# Altium PCB PCB1.PcbDoc
Units mm, origin at the board's own origin, x right, y up, seen from the top; angles counter-clockwise.
Board outline 72.39 x 101.6 mm, 2 copper layers (Top Layer, Bottom Layer); 11 components, 17 nets, 62 pads, 0 vias.
Unrouted connection lines stored in the file: 1.
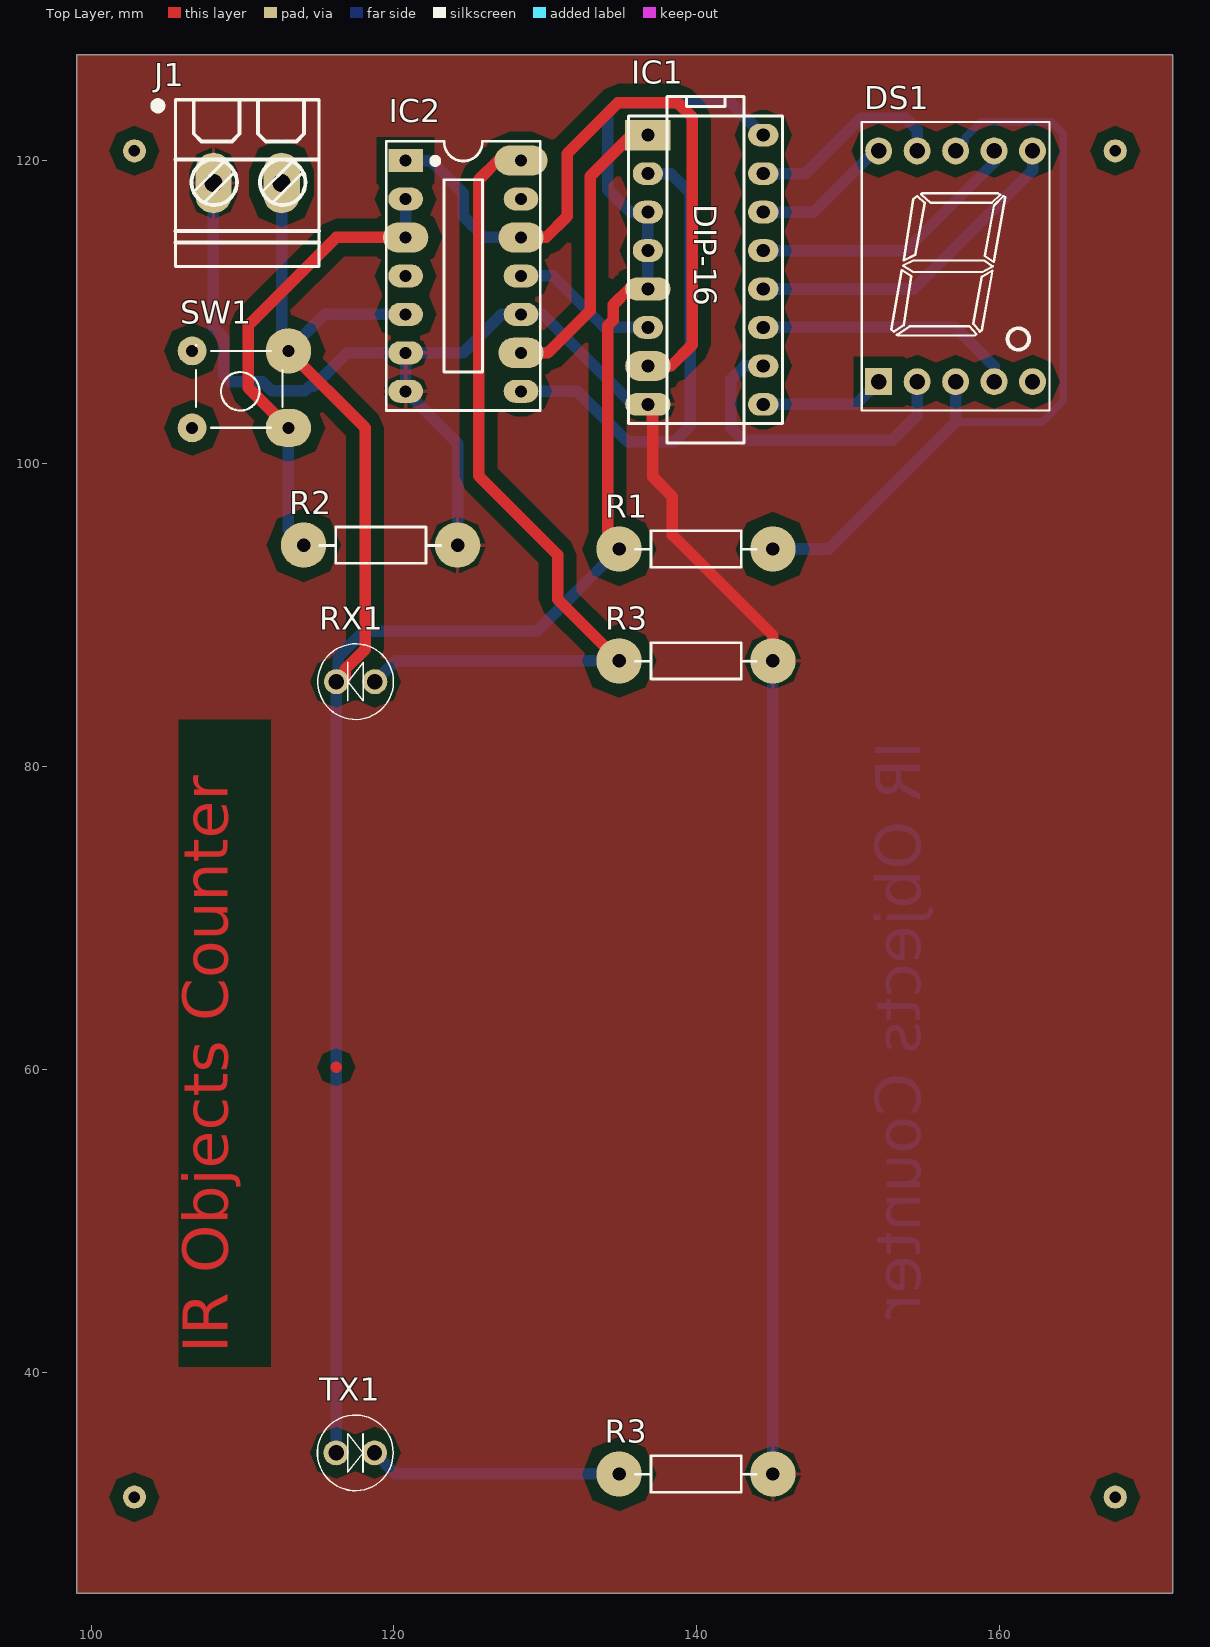
[diagram p0: Top Layer view]
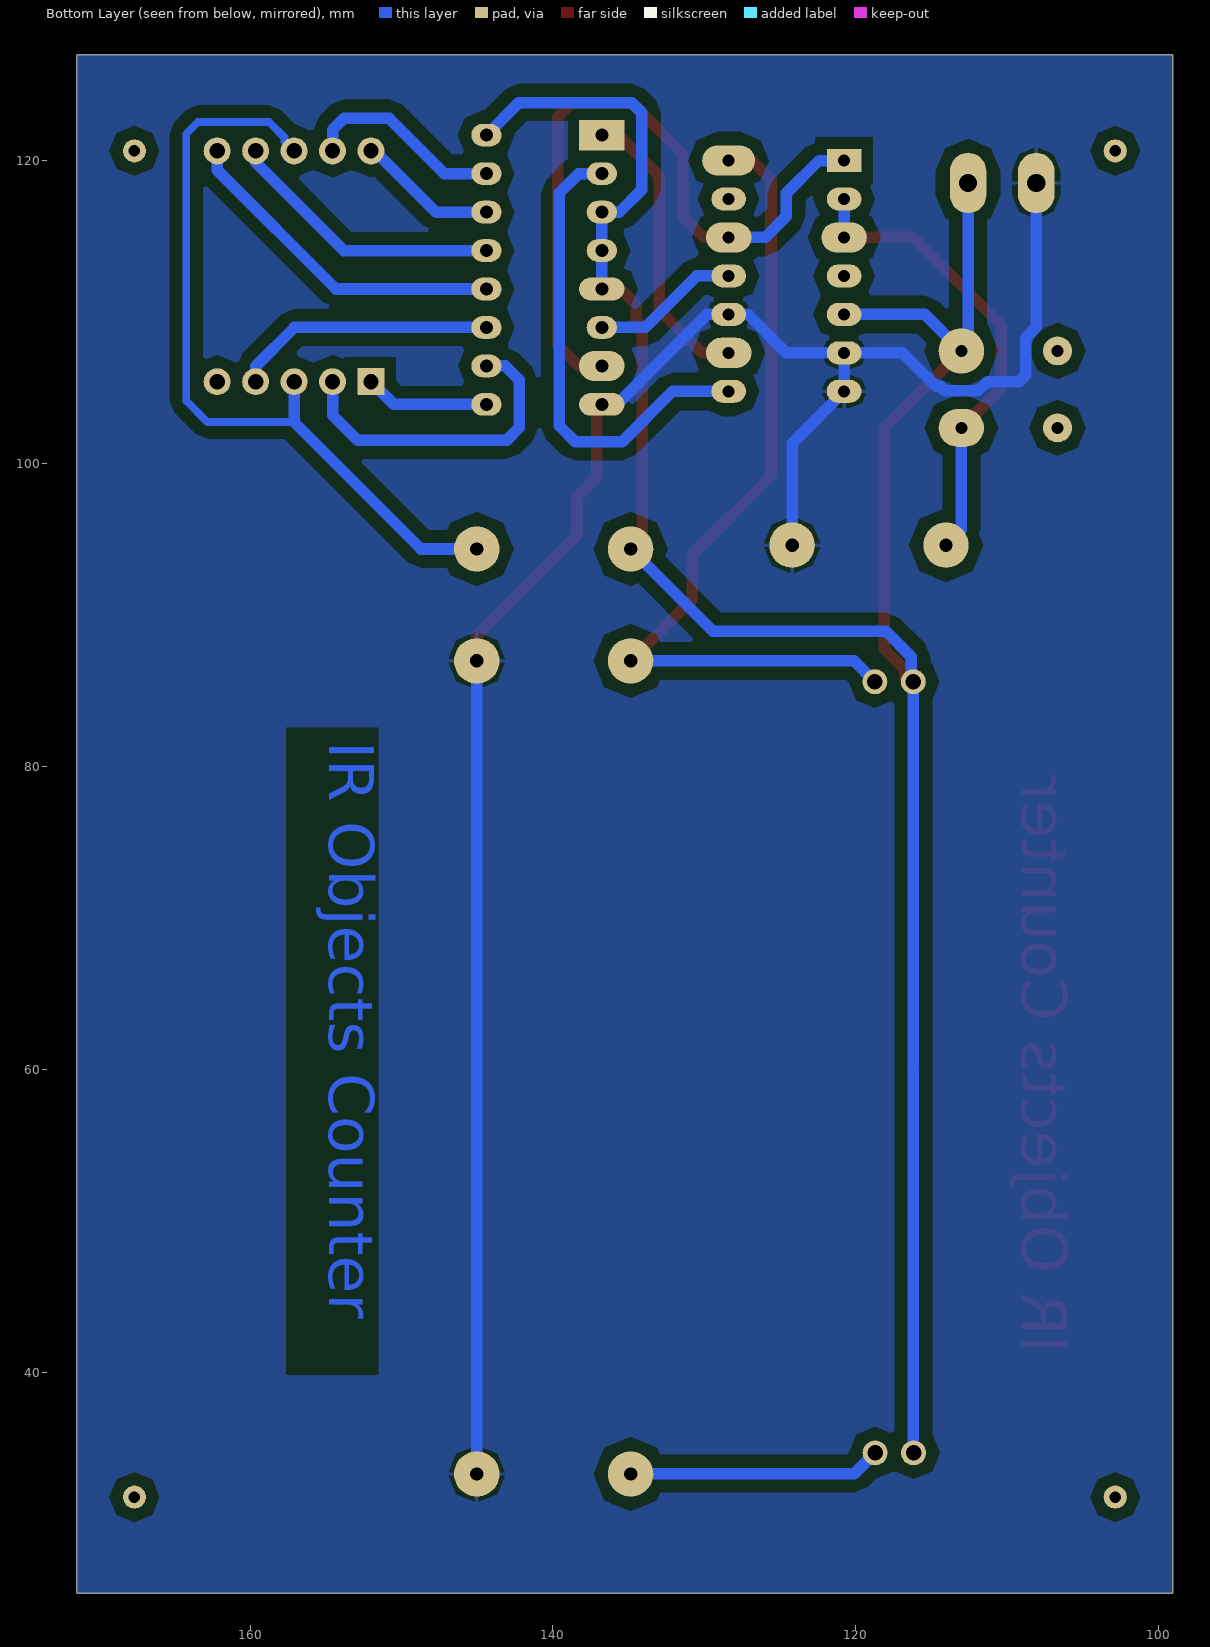
[diagram p1: Bottom Layer view, seen from below]
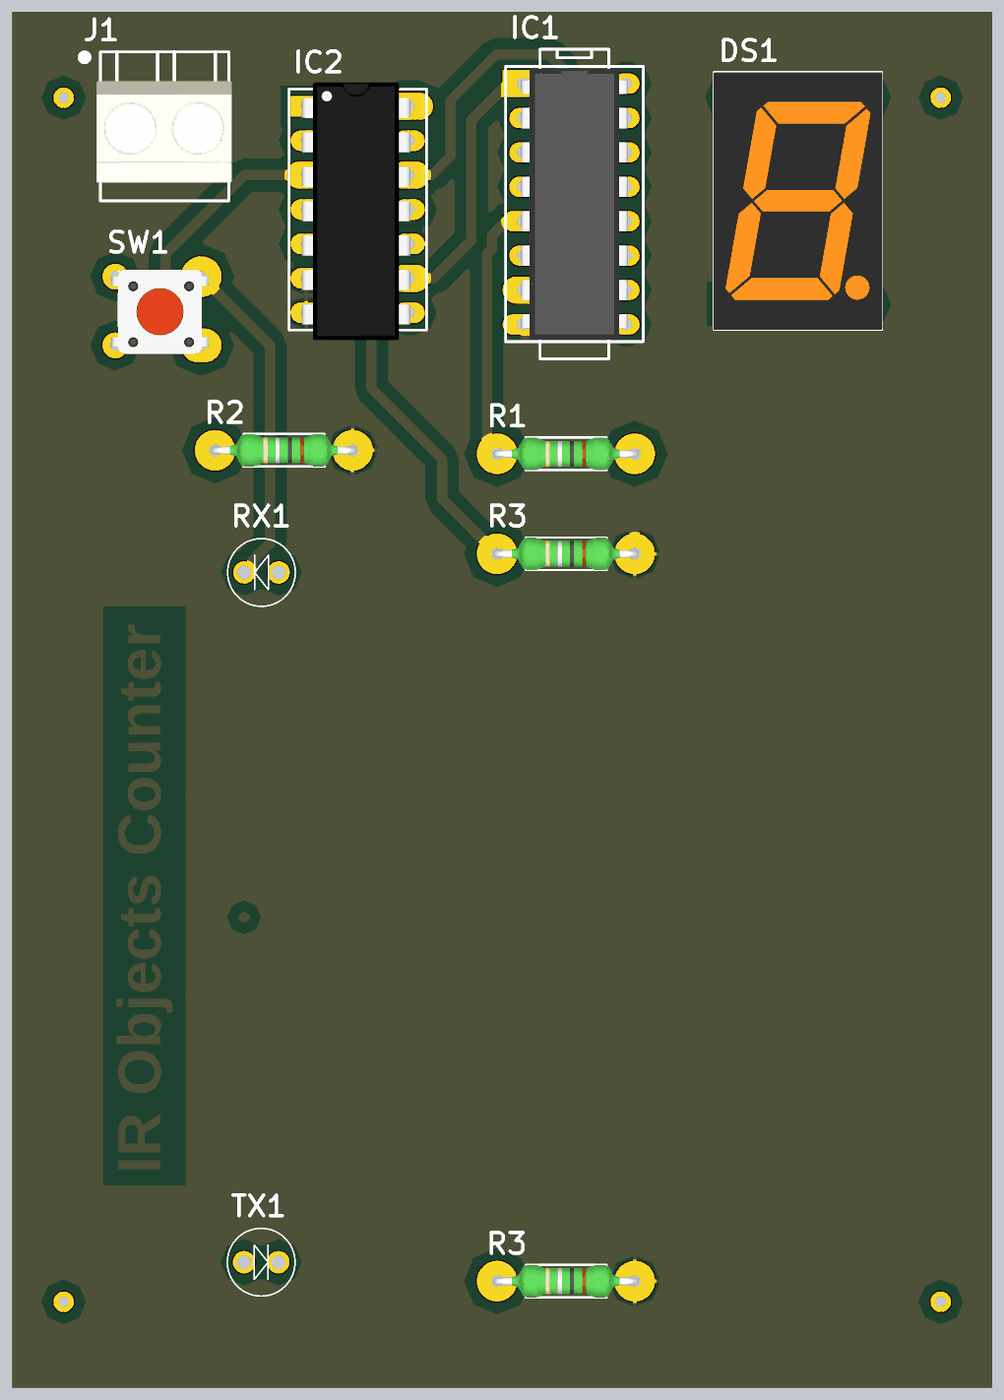
[diagram p2: 3D render of the assembled board from above, using the file's embedded part models]

## Layer stack, top to bottom
Top Solder: solder mask 0.0102, Solder Resist, Dk 3.5
Top Layer: signal copper 0.0356
Dielectric 1: dielectric 0.32, FR-4, Dk 4.8
Bottom Layer: signal copper 0.0356
Bottom Solder: solder mask 0.0102, Solder Resist, Dk 3.5

## Board outline
99.06,25.4 171.45,25.4 171.45,127 99.06,127

## Design rules (kind name [scope] priority, off if disabled: settings)
Clearance [All] p1: gap=0.762
PolygonConnect [All] p1: connectstyle=Relief reliefconductorwidth=0.254 reliefentries=4 polygonreliefangle="90 Angle" airgapwidth=0.254
RoutingVias [All] p1: holewidth=0.711 width=2.032 viastyle="Through Hole" minholewidth=0.711 minwidth=2.032 maxholewidth=0.711 maxwidth=2.032
SolderMaskExpansion [All] p1: expansion=0.102
Width [All] p1: maxlimit=0.762 minlimit=0.508 preferedwidth=0.762
30 further rules are at their usual default settings.

## Classes and differential pairs
component class Sheet1: DS1 IC1 IC2 J1 R1 R2 R3 RX1 SW1 TX1

## Components (designator, comment, footprint, x,y, rotation, side; value= is the part's Value field where it differs from the comment)
DS1 "7SEG" LED7SEG-1-0.56 156.972,112.395 r0 top
IC1 "7447" DIP16 140.589,112.794 r270 top
IC2 "7490" DIP14 120.777,120.015 r270 top
J1 "CON.Domino2" "Domino 2M" 115.062,113.03 r90 top
R1 "Res" RES-1/4W 140.335,94.234 r0 top
R2 "Res" RES-1/4W 119.507,94.488 r0 top
R3 "Res" RES-1/4W 140.335,33.147 r0 top
R3 "Res" RES-1/4W 140.335,86.849 r0 top
RX1 "LED" LED-5MM-BLUE 118.745,85.598 r180 top
SW1 "SW" SW2-DIP 113.03,102.362 r180 top
TX1 "LED" LED-5MM-WHITE 116.184,34.671 r0 top

## Footprints (in the part's own frame and the unit in brackets; to place one, negate y for a bottom-side part, rotate by r counter-clockwise, add the part's x,y. Pads: shape width x height; smd on the part's side, far side on the other; paste and mask are expansions set on the pad)
DIP14 [mil] "DIP, 14-Leads, Row Spacing 7.62mm, Pitch 2.54mm, Body 19.2x6.6mm"
  rect 60x90 hole 31: 1(0,0)
  oval 60x90 hole 31: 2(100,0) 4(300,0) 5(400,0) 6(500,0) 7(600,0) 8(600,300) 10(400,300) 11(300,300) 13(100,300)
  oval 78.74x118.11 hole 31: 3(200,0) 9(500,300) 12(200,300)
  oval 78.74x137.8 hole 31: 14(0,300)
  silkscreen extent -50,-50 650,350, body extent -70,-12 680,302, height 145
DIP16 [mm]
  rect 2x3 hole 0.864: 1(-8.897,-3.812)
  oval 1.5x2 hole 0.864: 2(-6.357,-3.812) 3(-3.817,-3.812) 4(-1.277,-3.812) 6(3.803,-3.812) 9(8.883,3.808) 10(6.343,3.808) 11(3.803,3.808) 12(1.263,3.808) 13(-1.277,3.808) 14(-3.817,3.808) 15(-6.357,3.808) 16(-8.897,3.808)
  oval 1.5x3 hole 0.864: 5(1.263,-3.812) 8(8.883,-3.812)
  oval 2x3 hole 0.864: 7(6.343,-3.812)
  silkscreen extent -11.44,-5.08 11.42,5.08, body extent -10,-3.93 10,3.94, height 1.99
"Domino 2M" [mm]
  oval 4x2.4 hole 1.2: 1(5.5,6.975) 2(5.5,2.475)
  silkscreen extent 0,0 11,10.9, body extent 1.35,-0.22 8.85,9.78, height 10
LED7SEG-1-0.56 [mil]
  rect 70x70 hole 40: 1(-195,-275)
  round 70 hole 40: 2(-95,-275) 3(5,-275) 4(105,-275) 5(205,-275) 6(205,325) 7(105,325) 8(5,325) 9(-95,325) 10(-195,325)
  silkscreen extent -239,-350 249,400, body extent -241,-349 251,399, height 315
LED-5MM-BLUE [mil]
  round 65 hole 40: 1(0,0) 2(100,0)
  silkscreen extent -48,-98 148,98, body extent -54,-105 155,105, height 370
LED-5MM-WHITE [mil]
  round 65 hole 40: 1(0,0) 2(100,0)
  silkscreen extent -48,-98 148,98, body extent -54,-105 155,105, height 370
RES-1/4W [mil]
  round 118.11 hole 35: 1(-215,5) 2(185,5)
  silkscreen extent -173,-42 141,52, body extent -227,-42 197,52, height 95
SW2-DIP [mm] "SW button 4pin, 250 x250 mil"
  oval 3x2.5 hole 0.787: 1(0,0)
  round 3 hole 0.787: 2(0,-5.08)
  round 1.905 hole 0.787: 3(6.35,-5.08) 4(6.35,0)
  silkscreen extent 0.38,-5.46 6.1,0, body extent -0.9,-5.59 7,0.61, height 7

## Part data
DS1: library part LED7SEG-1, "14.2 mm General Purpose Blue 7-Segment Display: CC, RH DP, Gray Surface"
IC1: "BCD to 7-Segment Decoder/Driver"
IC2: "4-Bit Decade Counter"
J1: "2 pins Domino Header"
RX1 TX1: "LED Single colour Green and Red"
SW1: library part SW4, "Switch button 4 pin"

## Free pads (board coordinates)
  round 1.524 hole 0.762: 3(102.87,120.65) 4(102.87,31.75) 5(167.64,120.65) 6(167.64,31.75)

## Nets (pads, with @x,y where several pads share a name; then routed paths per layer and width w, separated by ;. In a path a pad name is that pad's centre, name@x,y a point inside that pad or via, vN(x,y) a via of type N, cw(c..) or ccw(c..) an arc to the next point about the centre after c; other vN are vias at no path point)
GND: IC1.8 IC2.6 IC2.7 IC2.10 J1.1 R2.2 R3.2 | length 134.3
  Top Layer w0.762: IC1.8 137.096,103.911 137.096,99.123 138.398,97.822 138.398,95.282 145.034,88.646 R3.2@145.034,86.976
  Bottom Layer w0.762: J1.1 108.087,108.998 108.775,108.31 108.775,105.855 109.22,105.41 111.324,105.41 111.935,104.799 114.125,104.799 114.431,105.105 114.706,105.105 116.916,107.315 IC2.6 ; R2.2 124.206,101.346 IC2.7 IC2.6 ; IC1.8 135.763,103.911 129.819,109.855 IC2.10 127.127,109.855 124.587,107.315 IC2.6 ; R3.2@145.034,33.274 R3.2@145.034,86.976
NetDS1_1: DS1.1 IC1.9 | length 8.2
  Bottom Layer w0.762: IC1.9 150.52,103.911 DS1.1
NetDS1_2: DS1.2 IC1.10 | length 21.3
  Bottom Layer w0.762: IC1.10 143.154,106.451 142.24,105.537 142.24,102.362 143.053,101.549 152.908,101.549 154.559,103.2 DS1.2
NetDS1_3: DS1.3 DS1.8 R1.2 | length 51.9
  Bottom Layer w0.508: 157.099,102.743 162.814,102.743 164.211,104.14 164.211,121.793 163.449,122.555 158.75,122.555 157.734,121.539 157.734,121.285 DS1.8
  Bottom Layer w0.762: R1.2 148.717,94.361 157.099,102.743 DS1.3
NetDS1_4: DS1.4 IC1.11 | length 17.3
  Bottom Layer w0.762: IC1.11 157.074,108.991 159.639,106.426 DS1.4
NetDS1_6: DS1.6 IC1.12 | length 22.3
  Bottom Layer w0.762: IC1.12 154.33,111.531 162.179,119.38 DS1.6
NetDS1_7: DS1.7 IC1.13 | length 18.4
  Bottom Layer w0.762: IC1.13 153.822,114.071 159.639,119.888 DS1.7
NetDS1_9: DS1.9 IC1.15 | length 13.4
  Bottom Layer w0.762: IC1.15 147.168,119.151 150.825,122.809 153.797,122.809 154.559,122.047 DS1.9
NetDS1_10: DS1.10 IC1.14 | length 9.3
  Bottom Layer w0.762: IC1.14 147.676,116.611 147.701,116.586 151.765,120.65 DS1.10
NetIC1_1: IC1.1 IC2.9 | length 19.5
  Top Layer w0.762: IC2.9 130.175,107.315 132.969,110.109 132.969,118.974 135.687,121.691 IC1.1
NetIC1_2: IC1.2 IC2.8 | length 31.7
  Bottom Layer w0.762: IC2.8 132.105,104.775 135.433,101.448 138.532,101.448 139.573,102.489 139.573,117.881 138.303,119.151 IC1.2
NetIC1_6: IC1.6 IC2.11 | length 9.8
  Bottom Layer w0.762: IC2.11 130.505,112.395 133.909,108.991 IC1.6
NetIC1_7: IC1.7 IC2.1 IC2.12 | length 47
  Top Layer w0.762: IC2.12 130.048,114.935 131.445,116.332 131.445,120.476 134.804,123.834 138.751,123.834 139.7,122.885 139.7,107.848 138.303,106.451 IC1.7
  Bottom Layer w0.762: IC2.1 122.428,120.015 124.587,117.856 124.587,116.332 125.984,114.935 IC2.12
NetIC2_2: IC2.2 IC2.3 R2.1 SW1.1 | length 31.4
  Top Layer w0.762: SW1.1 110.387,105.005 110.387,109.117 116.205,114.935 IC2.3
  Bottom Layer w0.762: SW1.1 113.03,95.631 R2.1 ; IC2.3 IC2.2
NetIC2_14: IC2.14 R3.1@134.874,86.976 RX1.1 | length 55.6
  Top Layer w0.762: IC2.14 126.873,120.015 125.603,118.745 125.603,99.187 130.81,93.98 130.81,91.04 R3.1@134.874,86.976
  Bottom Layer w0.762: RX1.1 120.123,86.976 R3.1@134.874,86.976
NetR3_1: R3.1@134.874,33.274 TX1.2 | length 16.7
  Bottom Layer w0.762: TX1.2 120.102,33.293 R3.1@134.874,33.293
VCC: IC1.3 IC1.4 IC1.5 IC1.16 IC2.5 J1.2 R1.1 RX1.2 SW1.2 TX1.1 | length 163.2
  Top Layer w0.762: SW1.2 118.11,102.362 118.11,87.747 116.776,86.413 116.776,85.788 RX1.2@116.332,85.344 ; 116.184,60.122 116.205,60.143 ; R1.1 134.112,95.123 134.112,109.097 134.493,109.478 134.493,110.49 135.534,111.531 IC1.5
  Bottom Layer w0.762: J1.2 112.587,107.885 SW1.2 115.443,109.855 IC2.5 ; TX1.1 116.205,34.692 RX1.2 RX1.2@116.205,85.725 ; RX1.2@116.332,85.725 116.332,87.249 118.008,88.925 129.438,88.925 R1.1 ; IC1.5 IC1.4 IC1.3 135.611,116.611 134.134,118.088 134.134,123.165 134.804,123.834 142.254,123.834 IC1.16
pads on no net: DS1.5 IC2.4 IC2.13 SW1.3 SW1.4

## Polygon pours and split planes (outlines as drawn)
GND on Bottom Layer "Mechanical 1-No Net" (solid, pour order 4): 99.06,127 171.45,127 171.45,25.4 99.06,25.4 99.06,127
GND on Top Layer "Mechanical 1-No Net" (solid, pour order 6): 99.06,127 171.45,127 171.45,25.4 99.06,25.4 99.06,127

## Other copper
Top Layer:
  text "IR Objects Counter" at 110.007,41.25 h5.08 r90
Bottom Layer:
  text "IR Objects Counter" at 155.753,81.661 h5.08 r90

## Text inside footprints (layer, text, board x,y; h text height)
IC1: Top Overlay "DIP-16" at 139.825,117.119 h1.5 r270